# Altium PCB OptoPCB.PcbDoc
Units mil, origin at the board's own origin, x right, y up, seen from the top; angles counter-clockwise.
Board outline 1710 x 1460 mil, 2 copper layers (Top Layer, Bottom Layer); 28 components, 29 nets, 130 pads, 12 vias.
Unrouted connection lines stored in the file: 13.
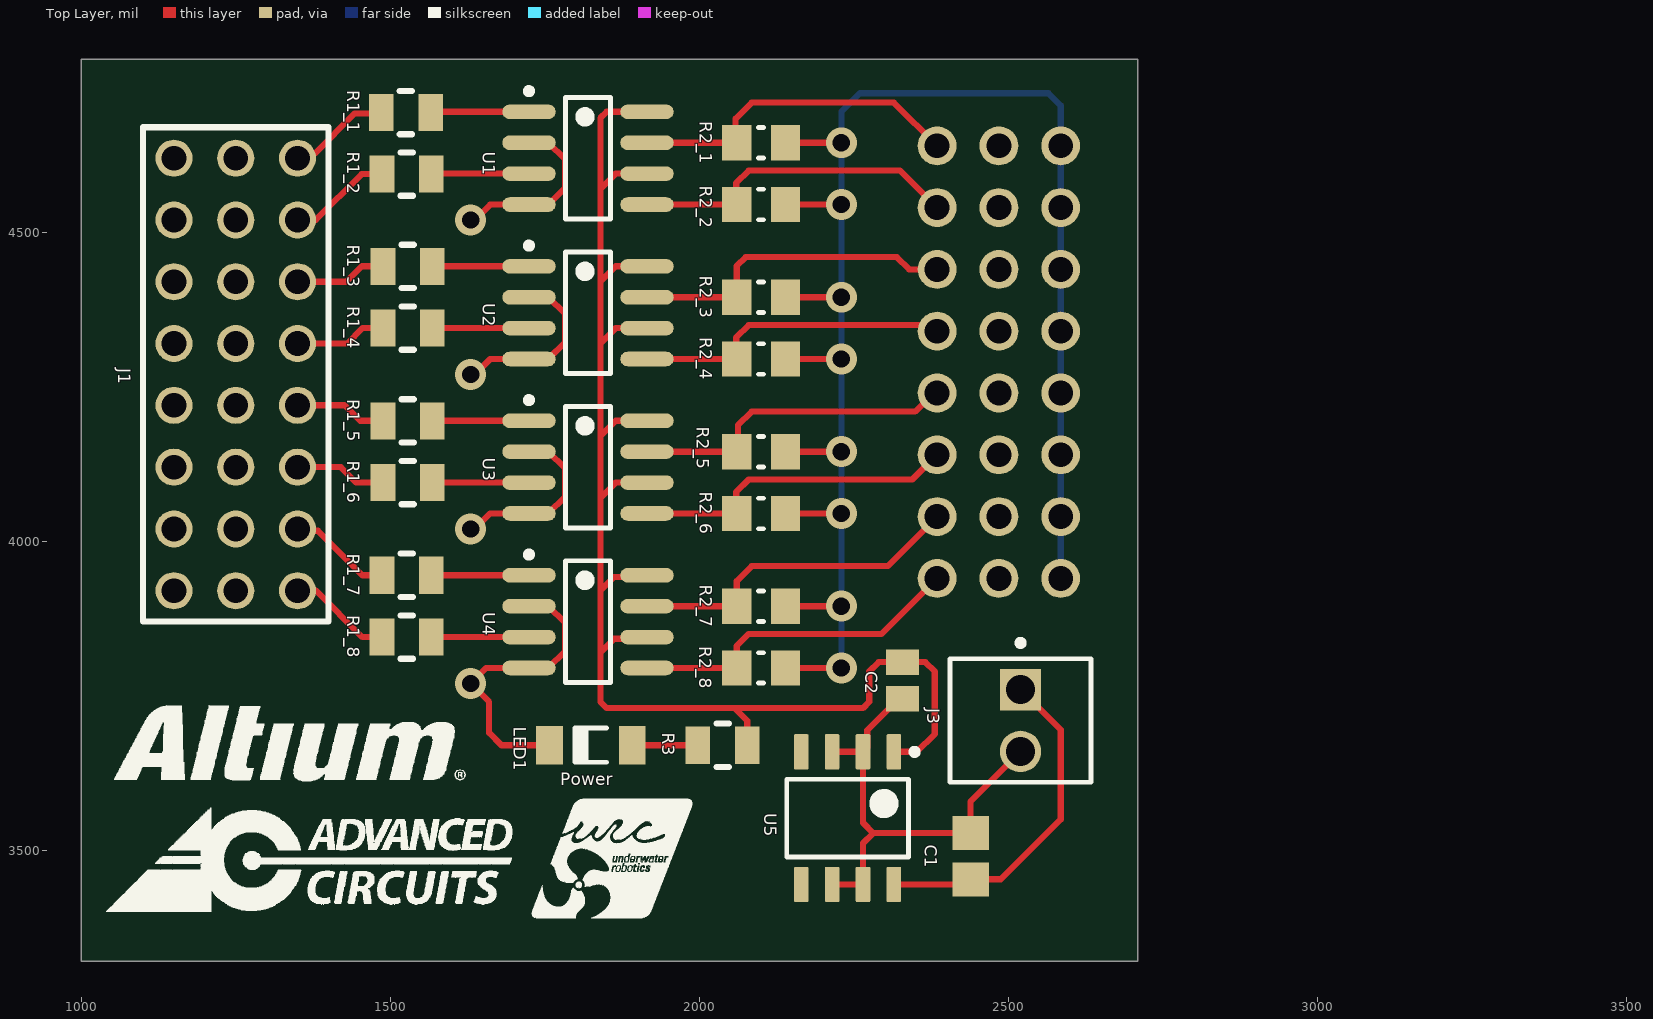
[diagram p0: Top Layer view]
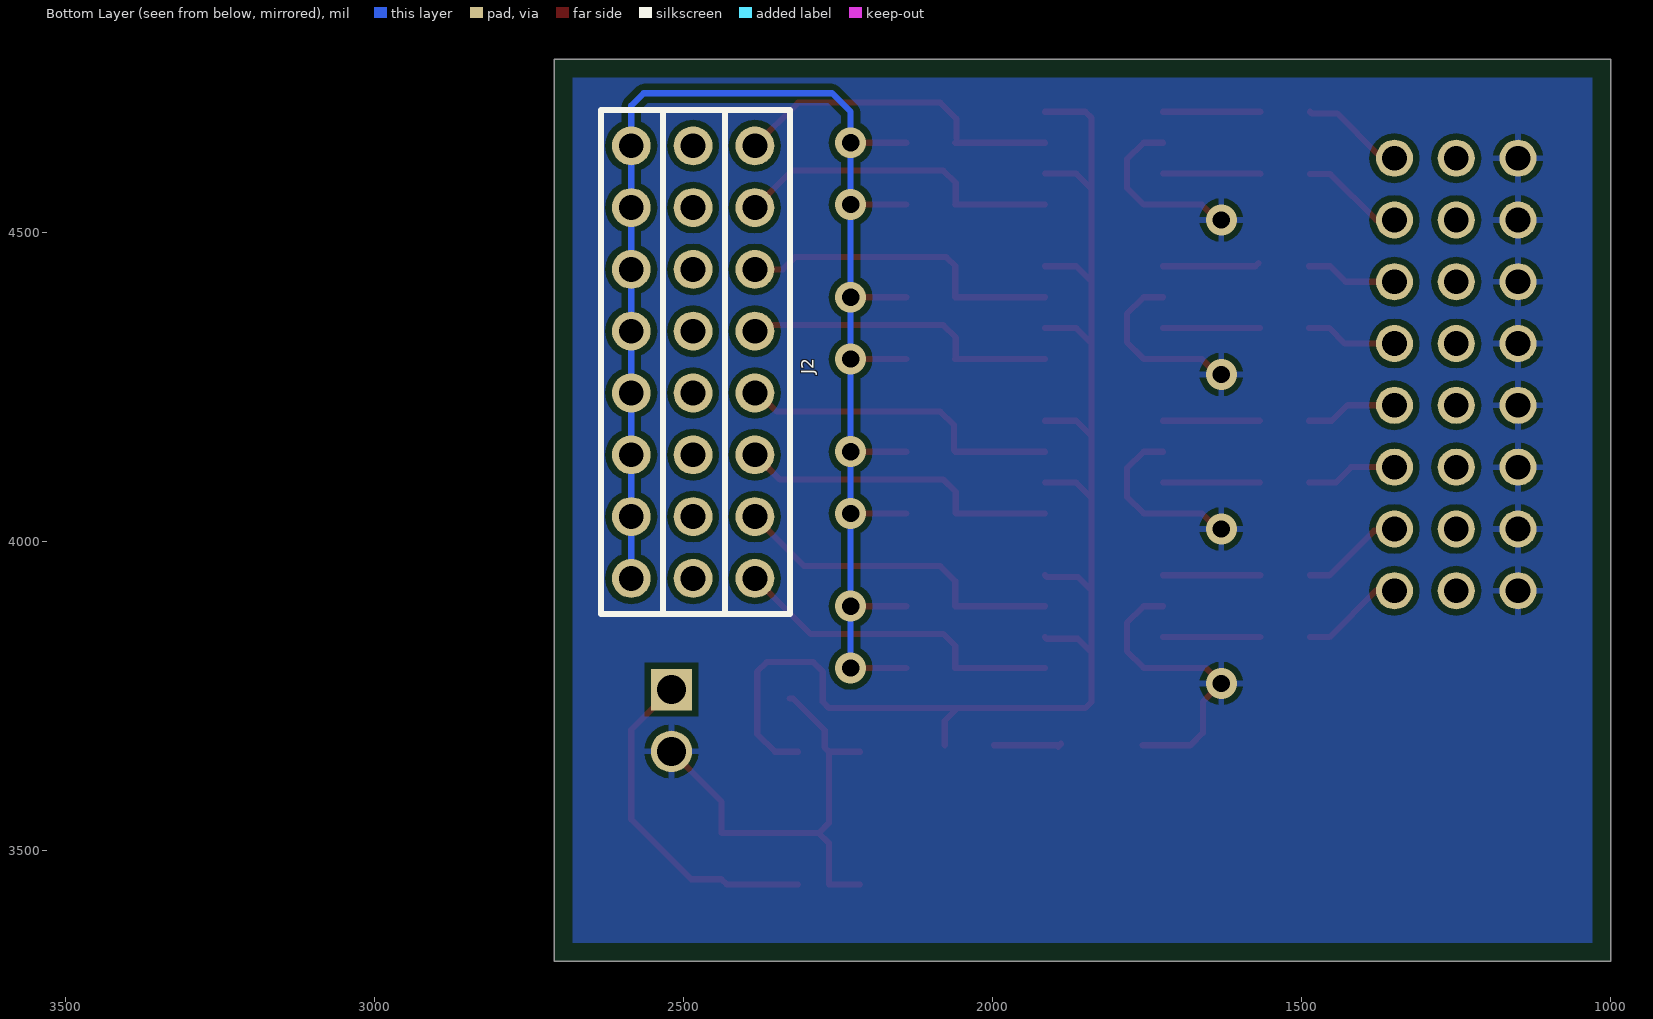
[diagram p1: Bottom Layer view, seen from below]

## Layer stack, top to bottom
Top Solder: solder mask 0.4, Solder Resist, Dk 3.5
Top Layer: signal copper 1.4
Dielectric 1: dielectric 12.6, FR-4, Dk 4.8
Bottom Layer: signal copper 1.4
Bottom Solder: solder mask 0.4, Solder Resist, Dk 3.5

## Board outline
1000,3320 2710,3320 2710,4780 1000,4780

## Design rules (kind name [scope] priority, off if disabled: settings)
Clearance [All] p1: gap=10 ignorepadtopadclearanceinfootprint=FALSE except(0: Arc-Hole Track-Hole SMDPad-Hole THPad-Hole Via-Hole Fill-Hole Poly-Hole Region-Hole Text-Hole)
PolygonConnect [All] p1: connectstyle=Relief reliefconductorwidth=10 reliefentries=4 polygonreliefangle="90 Angle" airgapwidth=10
RoutingVias [All] p1: holewidth=28 width=50 viastyle="Through Hole" minholewidth=28 minwidth=50 maxholewidth=28 maxwidth=50
SolderMaskExpansion [All] p1: expansion=4 istentingtop=FALSE
Width PWR [InNet('VCC')] p1: maxlimit=20 minlimit=20 preferedwidth=20 minimp=50.000000 maximp=50.000000 favimp=50.000000
Width [All] p2: maxlimit=20 minlimit=10 preferedwidth=10 minimp=50.000000 maximp=50.000000 favimp=50.000000
30 further rules are at their usual default settings.

## Classes and differential pairs
net class PWM_Output[8..1]: PWM_Output1 PWM_Output2 PWM_Output3 PWM_Output4 PWM_Output5 PWM_Output6 PWM_Output7 PWM_Output8
net class PWM_Input[8..1]: PWM_Input1 PWM_Input2 PWM_Input3 PWM_Input4 PWM_Input5 PWM_Input6 PWM_Input7 PWM_Input8
component class OptoBoard: C1 C2 J3 LED1 R1_1 R1_2 R1_3 R1_4 R1_5 R1_6 R1_7 R1_8 R2_1 R2_2 R2_3 R2_4 R2_5 R2_6 R2_7 R2_8 R3 U1 U2 U3 U4 U5
component class "Female Pix Hawk Header": J1
component class "ESC Male Header": 1 2 3 J2

## Components (designator, comment, footprint, x,y, rotation, side; value= is the part's Value field where it differs from the comment)
C1 "0.33 µF" CAPC2013X95X45ML10T25 2439,3490.4 r90 top
C2 "0.01 µF" CAPC2013X70X45LL15T25 2329,3775 r90 top
J1 "3x8Female Header" "3x8 Female Header" 1150,3920 r90 top
J2 "3x8Male Header" "3x8 Male Header" 2585,3940 r90 bottom
J3 "22-27-2021" MOLX-22-27-2021_V 2520,3710 r270 top
LED1 "2V" "1206  CYLINDRICAL- Reverse Use" 1824.78,3670 r0 top
R1_1 "210" SMD-0805-RES 1525.29,4693.75 r90 top
R1_2 "210" SMD-0805-RES 1526.54,4594.3 r90 top
R1_3 "210" SMD-0805-RES 1528.07,4445 r90 top
R1_4 "210" SMD-0805-RES 1528.07,4345 r90 top
R1_5 "210" SMD-0805-RES 1528.07,4195 r90 top
R1_6 "210" SMD-0805-RES 1528.07,4095 r90 top
R1_7 "210" SMD-0805-RES 1526.54,3945 r90 top
R1_8 "210" SMD-0805-RES 1526.54,3845 r90 top
R2_1 "1K" RESC2013X60X35ML10T20 2100,4645 r0 top value="1 kohm"
R2_2 "1K" RESC2013X60X35ML10T20 2100,4545 r0 top value="1 kohm"
R2_3 "1K" RESC2013X60X35ML10T20 2100,4395 r0 top value="1 kohm"
R2_4 "1K" RESC2013X60X35ML10T20 2100,4295 r0 top value="1 kohm"
R2_5 "1K" RESC2013X60X35ML10T20 2100,4145 r0 top value="1 kohm"
R2_6 "1K" RESC2013X60X35ML10T20 2100,4045 r0 top value="1 kohm"
R2_7 "1K" RESC2013X60X35ML10T20 2100,3895 r0 top value="1 kohm"
R2_8 "1K" RESC2013X60X35ML10T20 2100,3795 r0 top value="1 kohm"
R3 "200" SMD-0805-RES 2037.8,3670 r90 top
U1 "LTV-207" ZMDI-SOP-8_N 1820,4620 r0 top
U2 "LTV-207" ZMDI-SOP-8_N 1820,4370 r0 top
U3 "LTV-207" ZMDI-SOP-8_N 1820,4120 r0 top
U4 "LTV-207" ZMDI-SOP-8_N 1820,3870 r0 top
U5 "LM78L05ACMX" D0008A_N 2240,3552 r270 top

## Footprints (in the part's own frame and the unit in brackets; to place one, negate y for a bottom-side part, rotate by r counter-clockwise, add the part's x,y. Pads: shape width x height; smd on the part's side, far side on the other; paste and mask are expansions set on the pad)
"3x8 Female Header" [mil] "3x8 female header"
  round 60 hole 40: 1(0,0) 2(100,0) 3(200,0) 4(300,0) 5(400,0) 6(500,0) 7(600,0) 8(700,0) 9(0,-100) 10(100,-100) 11(200,-100) 12(300,-100) 13(400,-100) 14(500,-100) 15(600,-100) 16(700,-100) 17(0,-200) 18(100,-200) 19(200,-200) 20(300,-200) 21(400,-200) 22(500,-200) 23(600,-200) 24(700,-200)
  silkscreen extent -50,-250 750,50
"3x8 Male Header" [mm]
  round 1.6 hole 1.02: 1(0,0) 2(2.54,0) 3(5.08,0) 4(7.62,0) 5(10.16,0) 6(12.7,0) 7(15.24,0) 8(17.78,0) 9(0,-2.54) 10(2.54,-2.54) 11(5.08,-2.54) 12(7.62,-2.54) 13(10.16,-2.54) 14(12.7,-2.54) 15(15.24,-2.54) 16(17.78,-2.54) 17(0,-5.08) 18(2.54,-5.08) 19(5.08,-5.08) 20(7.62,-5.08) 21(10.16,-5.08) 22(12.7,-5.08) 23(15.24,-5.08) 24(17.78,-5.08)
  silkscreen extent -1.47,-6.53 19.25,1.25, body extent -1.34,-6.37 19.12,1.23, height 8.51
"1206  CYLINDRICAL- Reverse Use" [mm] "Chip LED, 2-Leads, Body 3.2x1.6mm, IPC Medium Density"
  rect 1.1x1.6 smd: 1(-1.7,0) 2(1.7,0)
  silkscreen extent -0.65,-0.7 0.65,0.7, body extent -1.6,-0.8 1.6,0.8, height 0.38
CAPC2013X70X45LL15T25 [mm] "Chip Capacitor, 2-Leads, Body 2.00x1.25mm, IPC High Density"
  rect 1.05x1.35 smd: 1(-0.75,0) 2(0.75,0)
  body extent -1.08,-0.7 1.07,0.7, height 0.7
CAPC2013X95X45ML10T25 [mm] "Chip Capacitor, 2-Leads, Body 2.00x1.25mm, IPC Low Density"
  rect 1.4x1.5 smd: 1(-0.95,0) 2(0.95,0)
  body extent -1.05,-0.67 1.05,0.67, height 0.95
D0008A_N [mm] "SOIC, 8-Leads, Body 5x4mm, Pitch 1.27mm, IPC Medium Density"
  rrect17% 1.45x0.6 smd: 1(-2.725,1.905) 2(-2.725,0.635) 3(-2.725,-0.635) 4(-2.725,-1.905) 5(2.725,-1.905) 6(2.725,-0.635) 7(2.725,0.635) 8(2.725,1.905)
  silkscreen extent -2.85,-2.5 1.6,2.88, body extent -3,-2.45 3,2.45, height 1.63
MOLX-22-27-2021_V [mm] "Header, 2-Leads, Body 5.8x5.08mm"
  rect 1.7x1.7 hole 1.19: 1(-1.27,0)
  round 1.7 hole 1.19: 2(1.27,0)
  silkscreen extent -3.31,-2.9 2.54,2.9, body extent -2.54,-2.9 2.54,2.9, height 11.72
RESC2013X60X35ML10T20 [mm] "Chip Resistor, 2-Leads, Body 2.1x1.35mm, IPC Low Density"
  rect 1.2x1.45 smd: 1(-1,0) 2(1,0)
  silkscreen extent -0.1,-0.63 0.1,0.63, body extent -1.05,-0.68 1.05,0.67, height 0.6
SMD-0805-RES [mil]
  rect 60x40 smd: 1(0,40) 2(0,-40)
  silkscreen extent -35,-10 35,10, body extent -24,-39 26,39, height 31
ZMDI-SOP-8_N [mm] "SOP, 8-Leads, Body 5x4mm, Pitch 1.27mm, IPC Medium Density"
  oval 2.2x0.6 smd: 1(-2.425,1.905) 2(-2.425,0.635) 3(-2.425,-0.635) 4(-2.425,-1.905) 5(2.425,-1.905) 6(2.425,-0.635) 7(2.425,0.635) 8(2.425,1.905)
  silkscreen extent -2.55,-2.5 0.93,2.88, body extent -2,-2.5 2,2.5, height 1.75

## Part data
C1: library part CMP-1036-04606-2, "±10% 50V Ceramic Capacitor X7R 0805 (2012 Metric)", Manufacturer=Murata, Manufacturer Part Number=GRM219R71H334KA88D, Part Number=GRM219R71H334KA88D
C2: library part CMP-2007-00806-1, "±10% 100V Ceramic Capacitor X7R 0805 (2012 Metric)", Manufacturer=Murata, Manufacturer Part Number=GCM216R72A103KA37D, Part Number=GCM216R72A103KA37D
J1: library part "3x8 Female Header", "3x8 female header", Manufacturer=URC, Manufacturer Part Number=Custom
J2: "3x8 male header", Manufacturer=URC, Manufacturer Part Number=Custom
J3: library part CMP-2000-05537-1, "Male Header, Pitch 2.54 mm, 1 x 2 Position, Height 11.7 mm, Tail Length 3.56 mm, 0 to 75 degC, RoHS, Bulk", Current - Max=4A, Manufacturer=Molex, Manufacturer Part Number=AE-6410-2A, Operating Temperature=0°Cto+75°C, Package Description="2-Leads Header, Body 5.08 x 5.8 mm, Pitch 2.54 mm", Package Version="Rev. BC, 02/2012", PartNumber=0022272021, Voltage - Max=250V, Contact material=Tinplatedbrass, Current rating=4A, Datasheet URL=http://www.molex.com/pdm_docs/sd/022272021_sd.pdf, Datasheet Version="Rev. F, 06/2009", Housing material=Nylon(UL94V-0), Manufacturer URL=http://www.molex.com/, Mounting Technology=ThroughHole, No. of Positions=2, No. of Rows=1, Orientation=Vertical, Package Reference=22-27-2021, Pitch=2.54mm, Voltage rating=250V
LED1: library part CMP-1428-00003-2, "SMD mono-color reverse mount waterclear Chip LED, WL-SMRW, Red, 156120RS75300", Color=Red, Manufacturer="Wuerth Elektronik", Manufacturer Part Number=156120RS75300, ComponentLink1Description="Manufacturer URL", ComponentLink1URL=http://www.we-online.com, ComponentLink2Description=Datasheet, ComponentLink2URL=http://katalog.we-online.com/led/datasheet/156120RS75300.pdf, Lens Type=Cylindrical, PackageReference="1206  CYLINDRICAL- Reverse Use", PartNumber=156120RS75300
R1_1 R1_2 R1_3 R1_4 R1_5 R1_6 R1_7 R1_8: library part ERJ-6ENF2100V, "RES SMD 210 OHM 1% 1/8W 0805", Digi-Key Part Number=P210CCT-ND, Manufacturer="Panasonic Electronic Components", Operating Temperature="-55°C ~ 155°C", Package / Case="0805 (2012 Metric)", Power (Watts)="0.125W, 1/8W", Supplier Device Package=0805, Temperature Coefficient=±100ppm/°C, Tolerance=±1%, @ qty=1500, Composition="Thick Film", Datasheets=http://industrial.panasonic.com/www-cgi/jvcr13pz.cgi?E+PZ+3+AOA0002+ERJ6ENF2100V+7+WW, Factory Stock=0, Failure Rate=-, Features="Automotive AEC-Q200", Height - Seated (Max)="0.028\" (0.70mm)", Image=//media.digikey.com/Renders/Panasonic%20Renders/ERJ-0805%20Pkg.jpg, Manufacturer Part Number=ERJ-6ENF2100V, Minimum Quantity=1, Number of Terminations=2, Packaging="Cut Tape (CT)", Part Number=ERJ-6ENF2100V, Part Status=Active, Quantity Available=47737, Series=ERJ, Size / Dimension="0.079\" L x 0.049\" W (2.00mm x 1.25mm)", Unit Price (USD)=0.00729
R2_1 R2_2 R2_3 R2_4 R2_5 R2_6 R2_7 R2_8: library part CMP-2100-03671-1, "Chip Resistor, 1 KOhm, +/- 1%, 125 mW, -55 to 155 degC, 0805 (2012 Metric), RoHS, Tape and Reel", Case Code (Imperial)=0805, Case Code (Metric)=2012, Manufacturer=Yageo, Manufacturer Part Number=RC0805FR-071KL, Max Operating Temperature=155degC, Max Power Dissipation=125mW, Min Operating Temperature=-55degC, Package Description="2-Pin Surface Mounted Device, Body 2 x 1.25 mm", Package Quantity=1, Resistance=1KOhm, Temperature Coefficient=100ppm/degreesC, Tolerance=1%, Voltage rating=150V, Case/Package=0805, Composition=ThickFilm, Datasheet URL=http://www.yageo.com/NewPortal/yageodocoutput?fileName=/pdf/R-Chip/PYu-RC_Group_51_RoHS_L_5.pdf, Datasheet Version="Rev. 5, 10/2016", Depth=1.25mm, Height=0.024inch, Lead Free=LeadFree, Length=0.079inch, Manufacturer URL=http://www.yageo.com/, Military Standard=Not, Number of Pins=2, Number of Terminations=2, Package Reference=0805, Packaging=TapeandReel, Power Rating=125mW, REACH SVHC=Unknown, RoHSCompliant=true, Termination=SMD/SMT, Voltage Rating (DC)=150V, Width=0.049inch
R3: library part ERJ-6ENF2000V, "RES SMD 200 OHM 1% 1/8W 0805", Digi-Key Part Number=P200CCT-ND, Manufacturer="Panasonic Electronic Components", Operating Temperature="-55°C ~ 155°C", Package / Case="0805 (2012 Metric)", Power (Watts)="0.125W, 1/8W", Supplier Device Package=0805, Temperature Coefficient=±100ppm/°C, Tolerance=±1%, @ qty=1500, Composition="Thick Film", Datasheets=http://industrial.panasonic.com/www-cgi/jvcr13pz.cgi?E+PZ+3+AOA0002+ERJ6ENF2000V+7+WW, Factory Stock=0, Failure Rate=-, Features="Automotive AEC-Q200", Height - Seated (Max)="0.028\" (0.70mm)", Image=//media.digikey.com/Renders/Panasonic%20Renders/ERJ-0805%20Pkg.jpg, Manufacturer Part Number=ERJ-6ENF2000V, Minimum Quantity=1, Number of Terminations=2, Packaging="Cut Tape (CT)", Part Number=ERJ-6ENF2000V, Part Status=Active, Quantity Available=150759, Series=ERJ, Size / Dimension="0.079\" L x 0.049\" W (2.00mm x 1.25mm)", Unit Price (USD)=0.00729
U1 U2 U3 U4: library part CMP-0848-00007-1, "Transistor Output Optocouplers SO8 100-200% 3.75KV 2CH Optocoupler", Manufacturer="Lite-On Inc.", ComponentLink1Description="Manufacturer URL", ComponentLink1URL=http://www.zmdi.com/, ComponentLink2Description=Datasheet, ComponentLink2URL=http://www.zmdi.com/sites/default/files/ZLED7010_DataSheet_Rev_1.1.pdf, ComponentLink3Description="Package Specification", ComponentLink3URL=http://www.zmdi.com/sites/default/files/ZLED7001_Data_Sheet_Rev_1.1.pdf, Manufacturer Part Number=LTV-207
U5: library part CMP-0062-01154-4, "3-Terminal Positive Regulator, 5 Vout, 8-pin Narrow SOIC, 2500 Reel", Manufacturer="Texas Instruments", PackageTopMarking=NSZXTT*LM78L*05ACM, PowerWise=N, Code_IPC=SOIC127P600-8, Code_JEDEC=MS-012-AA, ComponentLink1Description="Datasheet URL", ComponentLink1URL=http://www.ti.com/general/docs/lit/getliterature.tsp?genericPartNumber=LM78L05&fileType=pdf, CompType="LDO IC", High-Reliability=Y, PackageDescription="SOIC Narrow, 4.9 x 3.9 x 1.45mm, 8 Lead, 1.27mm Pitch", PackageReference=D0008A, PartNumber=LM78L05ACMX, PinCount=8, RoHS=N

## Via types
v1: diameter 50, hole 28, Top Layer to Bottom Layer, 12 vias

## Nets (pads, with @x,y where several pads share a name; then routed paths per layer and width w, separated by ;. In a path a pad name is that pad's centre, name@x,y a point inside that pad or via, vN(x,y) a via of type N, cw(c..) or ccw(c..) an arc to the next point about the centre after c; other vN are vias at no path point)
5V: C2.2 R3.2 U1.6 U1.8 U2.6 U2.8 U3.6 U3.8 U4.6 U4.8 U5.1 | length 2484.2
  Top Layer w10: U4.6 1912.87,3842.39 1862.39,3842.39 1840,3820 ; U4.8 1912.87,3942.39 1862.39,3942.39 1840,3920 ; U3.6 1865,4095 1840,4070 ; U3.8 1865,4195 1840,4170 ; U2.6 1865,4345 1840,4320 ; U2.8 1865,4445 1840,4420 ; U1.6 1865,4595 1840,4570 ; U1.8 1850,4695 1840,4685 1840,4570 ; R3.2 2077.8,3709.7 2057.5,3730 ; U5.1 2352.28,3659.28 2381,3688 2381,3789.51 2365.98,3804.53 C2.2 2290.47,3804.53 2275.24,3789.29 2275.24,3740.24 2265,3730 2057.5,3730 ; 1840,3820 1840,3920 ; 1840,3820 1840,3740 1850,3730 2057.5,3730 ; 1840,3920 1840,4070 ; 1840,4070 1840,4170 ; 1840,4170 1840,4320 ; 1840,4320 1840,4420 ; 1840,4420 1840,4570
GND: C1.2 C2.1 J1.1 J1.2 J1.3 J1.4 J1.5 J1.6 J1.7 J1.8 J3.2 LED1.1 U1.2 U1.4 U2.2 U2.4 U3.2 U3.4 U4.2 U4.4 U5.2 U5.3 U5.6 U5.7 | length 2129.1
  Top Layer w10: J1.3 J1.3@1152.5,4120 ; v1(1630,4020) 1636.57,4020 1661.57,4045 U3.4 1756.02,4045 1782.83,4071.81 1782.83,4118.19 1756.02,4145 U3.2 ; v1(1630,4270) 1636.57,4270 1661.57,4295 U2.4 1756.02,4295 1782.83,4321.81 1782.83,4368.19 1756.02,4395 U2.2 ; v1(1630,4520) 1636.57,4520 1661.57,4545 U1.4 1756.02,4545 1782.83,4571.81 1782.83,4618.19 1756.02,4645 U1.2 ; U4.2 1756.02,3895 1782.83,3868.19 1782.83,3821.81 1756.02,3795 U4.4 1655,3795 v1(1630,3770) 1660,3740 1660,3690 1680,3670 LED1.1 ; U5.6 U5.7 2265,3511.45 2281.35,3527.8 ; U5.3 U5.2 ; C2.1 2323.09,3745.47 2271.81,3694.19 2271.81,3666.09 U5.2 ; J3.2 2439,3579 C1.2 2281.35,3527.8 ; U5.2 2265,3544.16 2281.35,3527.8
NetLED1_2: LED1.2 R3.1 | length 112.8
  Top Layer w10: LED1.2@1889.32,3672.39 LED1.2@1894.1,3667.61 ; LED1.2 R3.1
NetR1_1_2: R1_1.2 U1.1 | length 158
  Top Layer w10: R1_1.2@1566.54,4695 U1.1
NetR1_2_2: R1_2.2 U1.3 | length 158.3
  Top Layer w10: R1_2.2 1567.23,4595 U1.3
NetR1_3_2: R1_3.2 U2.1 | length 156.6
  Top Layer w10: R1_3.2@1570,4450 1575,4445 U2.1
NetR1_4_2: R1_4.2 U2.3 | length 156.5
  Top Layer w10: R1_4.2 U2.3
NetR1_5_2: R1_5.2 U3.1 | length 156.5
  Top Layer w10: R1_5.2 U3.1
NetR1_6_2: R1_6.2 U3.3 | length 156.5
  Top Layer w10: R1_6.2 U3.3
NetR1_7_2: R1_7.2 U4.1 | length 158
  Top Layer w10: R1_7.2 U4.1
NetR1_8_2: R1_8.2 U4.3 | length 158
  Top Layer w10: R1_8.2 U4.3
PWM_Input1: J1.17 R1_8.1 | length 167.6
  Top Layer w10: J1.17 1380,3920 1455,3845 R1_8.1
PWM_Input2: J1.18 R1_7.1 | length 167.6
  Top Layer w10: J1.18 1353.01,4016.99 1383.01,4016.99 1455,3945 R1_7.1
PWM_Input3: J1.19 R1_6.1 | length 148.4
  Top Layer w10: J1.19 1420,4120 1445,4095 R1_6.1
PWM_Input4: J1.20 R1_5.1 | length 148.6
  Top Layer w10: J1.20 1350.2,4220.2 1426.16,4220.2 1451.36,4195 R1_5.1
PWM_Input5: J1.21 R1_4.1 | length 148.4
  Top Layer w10: J1.21 1430,4320 1455,4345 R1_4.1
PWM_Input6: J1.22 R1_3.1 | length 148.4
  Top Layer w10: J1.22 1428.96,4420 1453.96,4445 R1_3.1
PWM_Input7: J1.23 R1_2.1 | length 167.3
  Top Layer w10: J1.23 1379.47,4520 1453.77,4594.3 R1_2.1
PWM_Input8: J1.24 R1_1.1 | length 167.6
  Top Layer w10: J1.24 1357.5,4627.5 1377.5,4627.5 1442.5,4692.5 1484.04,4692.5 R1_1.1@1486.54,4695
PWM_Output1: J2.17 R2_8.1 U4.5 | length 550.5
  Top Layer w10: U4.5 R2_8.1 2060.63,3830.63 2080,3850 2295,3850 J2.17
PWM_Output2: J2.18 R2_7.1 U4.7 | length 553.4
  Top Layer w10: U4.7 R2_7.1 2060.63,3935.63 2085,3960 2305,3960 J2.18
PWM_Output3: J2.19 R2_6.1 U3.5 | length 529
  Top Layer w10: U3.5 2059.37,4045 2060,4045.63 2060,4080 2080,4100 2345,4100 J2.19
PWM_Output4: J2.20 R2_5.1 U3.7 | length 532.7
  Top Layer w10: U3.7 R2_5.1 2062.69,4147.06 2062.69,4187.69 2085,4210 2349.24,4210 2379.24,4240 J2.20
PWM_Output5: J2.21 R2_4.1 U2.5 | length 517.8
  Top Layer w10: U2.5 R2_4.1 2060,4295.63 2060,4330 2080,4350 2375,4350 J2.21
PWM_Output6: J2.22 R2_3.1 U2.7 | length 534.4
  Top Layer w10: U2.7 R2_3.1 2060.63,4445.63 2075,4460 2319.49,4460 2339.49,4440 J2.22
PWM_Output7: J2.23 R2_2.1 U1.5 | length 538.6
  Top Layer w10: U1.5 R2_2.1 2060,4545.63 2060,4580 2080,4600 2325,4600 J2.23
PWM_Output8: J2.24 R2_1.1 U1.7 | length 543.4
  Top Layer w10: U1.7 R2_1.1 ; R2_1.1@2058.74,4651.67 2058.74,4683.74 2085,4710 2315,4710 J2.24
T_GND: J2.1 J2.2 J2.3 J2.4 J2.5 J2.6 J2.7 J2.8 R2_1.2 R2_2.2 R2_3.2 R2_4.2 R2_5.2 R2_6.2 R2_7.2 R2_8.2 | length 2765.7
  Top Layer w10: R2_8.2 v1(2230,3795) ; R2_7.2 v1(2230,3895) ; R2_6.2 v1(2230,4045) ; R2_5.2 v1(2230,4145) ; R2_4.2 v1(2230,4295) ; R2_3.2 v1(2230,4395) ; R2_2.2 v1(2230,4545) ; R2_1.2 v1(2230,4645)
  Bottom Layer w10: v1(2230,3795) v1(2230,3895) v1(2230,4045) v1(2230,4145) v1(2230,4295) v1(2230,4395) v1(2230,4545) v1(2230,4645) 2230,4695 2260,4725 2565,4725 2585,4705 J2.8 J2.7 J2.6 J2.5 J2.4 J2.3 J2.2 J2.1
VBAT: C1.1 J3.1 U5.8 | length 550.5
  Top Layer w10: U5.8 2430.72,3444.72 C1.1 2488,3453 2585,3550 2585,3695 J3.1
pads on no net: J1.9 J1.10 J1.11 J1.12 J1.13 J1.14 J1.15 J1.16 J2.9 J2.10 J2.11 J2.12 J2.13 J2.14 J2.15 J2.16 U5.4 U5.5

## Polygon pours and split planes (outlines as drawn)
GND on Bottom Layer "GND_L02_P007" (solid, pour order 7): 1030,4750 2680,4750 2680,3350 1030,3350
no net on Bottom Layer "NONET_L02_P006" (solid, pour order 6): 1040,4740
no net on Bottom Layer "NONET_L02_P000" (solid, pour order 0): 1030,4750

## Other copper
Bottom Layer:
  pour cut-out: 1065,3425
  pour cut-out: 3475,4385

## Silkscreen, mask and mechanical layers (free items; w line width, h text height)
Top Overlay:
  drawing of 39 lines, arcs and shapes, not listed
  text "Power" at 1775,3605 h20

## Text inside footprints (layer, text, board x,y; h text height)
LED1: Drill Guide "Require cutout in pcb" at 1731.28,3734.96 h10